# Altium PCB A-865_ATMEGA1_BHARAT AERO (1).PcbDoc
Units mm, origin at the board's own origin, x right, y up, seen from the top; angles counter-clockwise.
Board outline 160.15 x 104.65 mm, 2 copper layers (Top Layer, Bottom Layer); 38 components, 61 nets, 195 pads, 16 vias.
Unrouted connection lines stored in the file: 1.
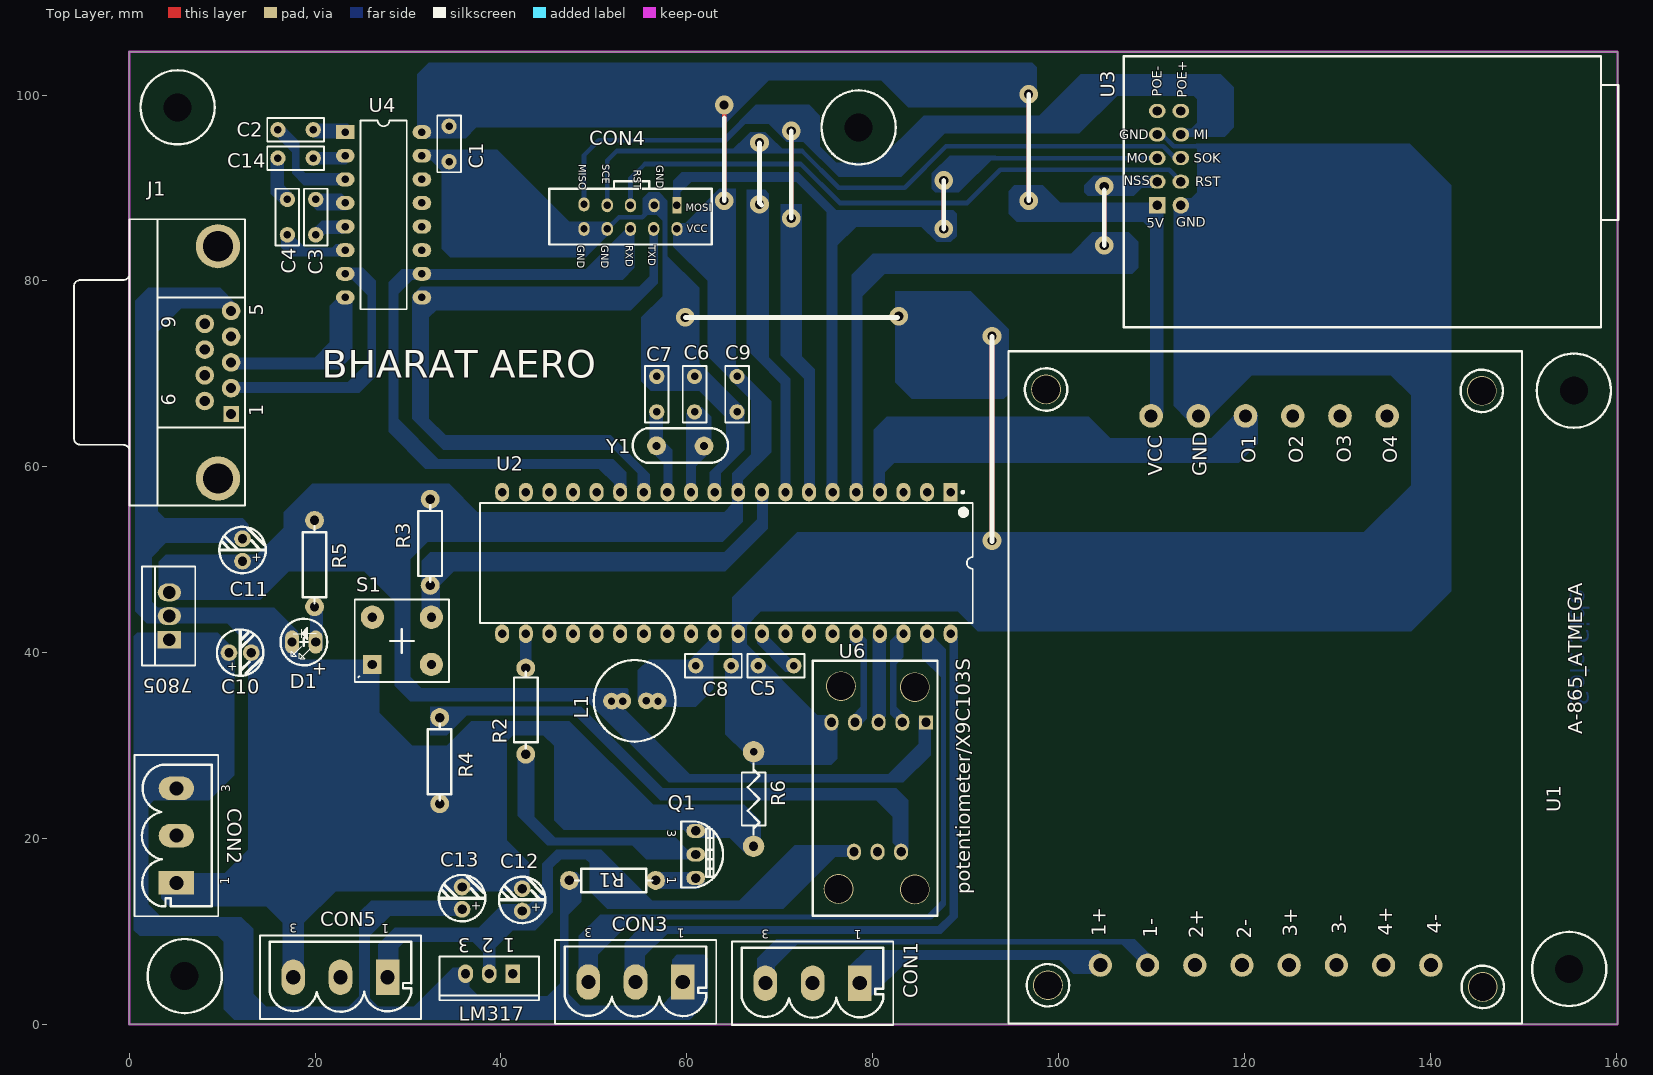
[diagram p0: Top Layer view]
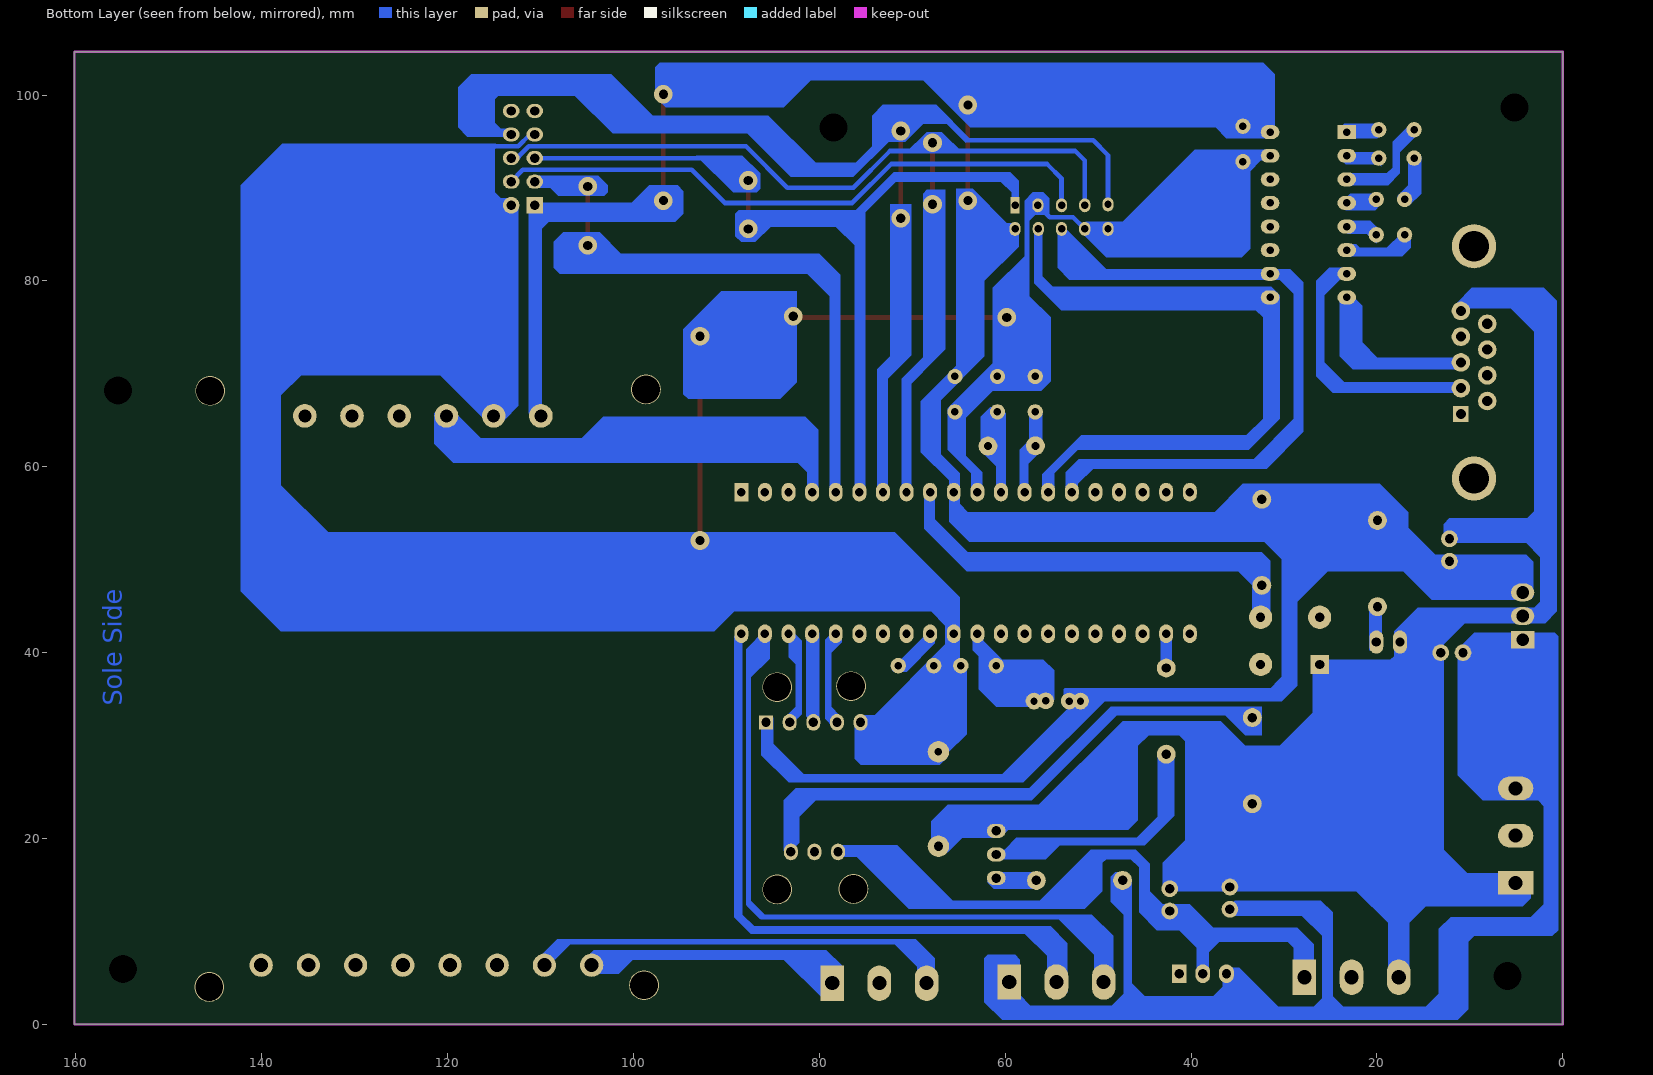
[diagram p1: Bottom Layer view, seen from below]

## Layer stack, top to bottom
Top Solder: solder mask 0.0102, Solder Resist, Dk 3.5
Top Layer: signal copper 0.0356
Dielectric1: dielectric 0.32, FR-4, Dk 4.8
Bottom Layer: signal copper 0.0356
Bottom Solder: solder mask 0.0102, Solder Resist, Dk 3.5

## Board outline
0,0 0,104.648 160.147,104.648 160.147,0

## Design rules (kind name [scope] priority, off if disabled: settings)
Clearance [All] p1: gap=0.254
PolygonConnect [All] p1: connectstyle=Relief reliefconductorwidth=0.254 reliefentries=4 polygonreliefangle="90 Angle" airgapwidth=0.254
RoomDefinition "A-865_ATMEGA1_BHARAT AERO (1)" [InComponentClass('A-865_ATMEGA1_BHARAT AERO (1)')] p1: confinementstyle=ConfineIn formatcopy=TRUE lockcomponents=FALSE outline -221.869,-110.998 -171.069,-110.998 -171.069,-85.598 -221.869,-85.598
RoutingVias [All] p1: holewidth=0.711 width=1.27 viastyle="Through Hole" minholewidth=0.711 minwidth=1.27 maxholewidth=0.711 maxwidth=1.27
SolderMaskExpansion [All] p1: expansion=0.102
Width [All] p1: maxlimit=0.5 minlimit=0.254 preferedwidth=0.35 minimp=50.000000 maximp=50.000000 favimp=50.000000
30 further rules are at their usual default settings.

## Components (designator, comment, footprint, x,y, rotation, side; value= is the part's Value field where it differs from the comment)
7805 "Volt Reg" 7805/TO220AB 4.318,41.402 r90 top
C1 "Cap" RAD/.150X.150/LS.100/.031 34.417,96.647 r270 top
C2 "Cap" RAD/.150X.150/LS.100/.031 19.812,96.266 r180 top
C3 "Cap" RAD/.150X.150/LS.100/.031 20.066,88.773 r270 top
C4 "Cap" RAD/.150X.150/LS.100/.031 17.018,84.963 r90 top
C5 "Cap" RAD/.150X.150/LS.100/.031 71.501,38.608 r180 top
C6 "Cap" RAD/.150X.150/LS.100/.031_10 60.833,69.723 r270 top
C7 "Cap" RAD/.150X.150/LS.100/.031_10 56.769,69.723 r270 top
C8 "Cap" RAD/.150X.150/LS.100/.031 64.77,38.608 r180 top
C9 "Cap" RAD/.150X.150/LS.100/.031 65.405,65.913 r90 top
C10 "Cap2" 100UF/16V 11.938,40.005 r0 top
C11 "Cap2" 100UF/16V 12.192,51.054 r90 top
C12 "NP" 100UF/16V 42.291,13.405 r90 top
C13 "Cap2" 100UF/16V 35.814,13.589 r90 top
C14 "Cap" RAD/.150X.150/LS.100/.031 19.812,93.218 r180 top
CON1 "CONNECTOR/5mm" "Applied- 3 pin 5.08mm pitch New1" 78.613,4.445 r180 top
CON2 "CONNECTOR" "Applied- 3 pin 5.08mm pitch New1" 5.08,15.24 r90 top
CON3 "CONNECTOR" "Applied- 3 pin 5.08mm pitch New1" 59.563,4.572 r180 top
CON4 "AVRUSBASP" DIP10 58.935,88.138 r270 top
CON5 "CONNECTOR" "Applied- 3 pin 5.08mm pitch New1" 27.813,5.08 r180 top
D1 "5MM PITCH" LED_5MM 18.796,41.148 r180 top
J1 "D Connector 9" DSUB1.385-2H9 0.048,71.235 r90 top
L1 "Inductor" WE-7447462033 53.146,34.798 r0 top
LM317 "LM317KC" KC03 38.735,5.461 r180 top
Q1 "NPN/2n2222" "TO-92 CASE 123" 60.96,18.288 r270 top
R1 "Res Semi" 1.5K/AXIAL0.4_SMALL 57.531,15.494 r180 top
R2 "Res1" 1.5K/AXIAL0.4_SMALL 42.672,39.243 r270 top
R3 "Res3" 1.5K/AXIAL0.4_SMALL 32.385,46.355 r90 top
R4 "Res1" 1.5K/AXIAL0.4_SMALL 33.401,22.86 r90 top
R5 "Res1" 1.5K/AXIAL0.4_SMALL 19.939,44.069 r90 top
R6 "Res3" RESISTANCE-1/4W 67.183,19.177 r90 top
S1 "SW-PB" "TECTILE SWITCH-SW1" 29.337,41.275 r0 top
U1 "OPTOCOUPLER" OPTOCOUPLER 149.86,0.102 r90 top
U2 "ATmega16-16PC" 40P6 64.262,49.657 r270 top
U3 "W5100" W5100 110.617,98.298 r0 top
U4 "MAX232" mx232 23.241,96.012 r0 top
U6 "potentiometer/X9C103S" POTENTIOMETER1 85.725,32.512 r270 top
Y1 "XTAL" "CRYSTAL KDS16" 56.744,62.255 r0 top

## Footprints (in the part's own frame and the unit in brackets; to place one, negate y for a bottom-side part, rotate by r counter-clockwise, add the part's x,y. Pads: shape width x height; smd on the part's side, far side on the other; paste and mask are expansions set on the pad)
1.5K/AXIAL0.4_SMALL [mil]
  round 80 / inner round 62 / far side round 80 hole 40: 1(35,0) 2(400,0)
  silkscreen extent 50,-50 375,50
40P6 [mm] "DIP, 40-Leads, Row Spacing 15.24mm, Pitch 2.54mm, Body 52.2x13.95mm"
  rect 2x1.5 hole 0.9: 1(-7.62,24.13)
  oval 2x1.5 hole 0.9: 2(-7.62,21.59) 3(-7.62,19.05) 4(-7.62,16.51) 5(-7.62,13.97) 6(-7.62,11.43) 7(-7.62,8.89) 8(-7.62,6.35) 9(-7.62,3.81) 10(-7.62,1.27) 11(-7.62,-1.27) 12(-7.62,-3.81) 13(-7.62,-6.35) 14(-7.62,-8.89) 15(-7.62,-11.43) 16(-7.62,-13.97) 17(-7.62,-16.51) 18(-7.62,-19.05) 19(-7.62,-21.59) 20(-7.62,-24.13) 21(7.62,-24.13) 22(7.62,-21.59) 23(7.62,-19.05) 24(7.62,-16.51) 25(7.62,-13.97) 26(7.62,-11.43) 27(7.62,-8.89) 28(7.62,-6.35) 29(7.62,-3.81) 30(7.62,-1.27) 31(7.62,1.27) 32(7.62,3.81) 33(7.62,6.35) 34(7.62,8.89) 35(7.62,11.43) 36(7.62,13.97) 37(7.62,16.51) 38(7.62,19.05) 39(7.62,21.59) 40(7.62,24.13)
  silkscreen extent -7.74,-26.5 6.45,26.5, body extent -7.05,-26.47 7.05,26.47, height 4.83
100UF/16V [mm]
  round 1.8 hole 1.016: 1(-1.2,0) 2(1.2,0)
  silkscreen extent -2.5,-2.5 2.5,2.5
7805/TO220AB [mm]
  rect 1.905x2.5 hole 1.372: 1(0,0)
  oval 1.905x2.5 hole 1.372: 2(2.54,0) 3(5.08,0)
  silkscreen extent -2.79,-2.79 7.87,2.92
"Applied- 3 pin 5.08mm pitch New1" [mm]
  rect 2.54x3.81 / inner round 1.524 / far side rect 2.54x3.81 hole 1.52: 1(0,0)
  oval 2.54x3.81 / inner round 1.524 / far side oval 2.54x3.81 hole 1.52: 2(5.08,0) 3(10.16,0)
  silkscreen extent -3.6,-4.5 13.76,4.5
"CRYSTAL KDS16" [mil]
  round 80 / inner round 79.9 / far side round 80 hole 34: 1(0,0) 2(201,-1)
  silkscreen extent -101,-71 303,74
DIP10 [mm]
  rect 1.8x1 hole 0.8: 1(0,0)
  oval 1.5x1.2 hole 0.8: 2(2.54,0) 3(0,-2.45) 4(2.54,-2.5) 5(0,-5) 6(2.54,-5) 7(0,-7.5) 8(2.54,-7.5) 9(-0.1,-10) 10(2.54,-10)
  silkscreen extent -2.59,-13.75 4.22,3.75
DSUB1.385-2H9 [mm] "Connector; D Subminiature; 9 Position; Right Angle; Pitch 1.385 mm"
  rect 1.69x1.69 hole 1.09: 1(-5.54,-10.92)
  round 2 hole 1.09: 2(-2.77,-10.92) 3(0,-10.92) 4(2.77,-10.92) 5(5.54,-10.92) 6(-4.155,-8.08) 7(-1.385,-8.08) 8(1.385,-8.08) 9(4.155,-8.08)
  round 4.76 hole 3.26: 10(-12.495,-9.5) 11(12.495,-9.5)
  silkscreen extent -15.4,-12.4 15.4,6
KC03 [mm] "TO, Thru-Hole, Vertical, Heatsink Mounted; 3 In-Line Leads; Pitch 2.54 mm"
  rect 1.6x2 hole 1: 1(-2.54,0)
  oval 1.6x2 hole 1: 2(0,0) 3(2.54,0)
  silkscreen extent -5.35,-1.85 5.35,2.85
LED_5MM [mm]
  oval 1.499x2.5 hole 0.991: 1(-1.27,0) 2(1.27,0)
  silkscreen extent -2.51,-2.51 2.5,2.51
mx232 [mm]
  rect 2x1.5 hole 0.8: 1(0,0)
  oval 2x1.5 hole 0.8: 2(0,-2.54) 3(0,-5.08) 4(0,-7.62) 5(0,-10.16) 6(0,-12.7) 7(0,-15.24) 8(0,-17.78) 9(8.26,-17.78) 10(8.26,-15.24) 11(8.26,-12.7) 12(8.26,-10.16) 13(8.26,-7.62) 14(8.26,-5.08) 15(8.26,-2.54) 16(8.26,0)
  silkscreen extent 1.63,-19.05 6.62,1.27
OPTOCOUPLER [mil]
  round 98.43 hole 59.06: 1(247,1786) 2(247,1586) 3(247,1386) 4(247,1186) 5(247,986) 6(247,786) 7(247,586) 8(247,386)
  round 100 hole 55: 9(2574,571) 10(2574,771) 11(2574,971) 12(2574,1171) 13(2574,1371) 14(2574,1571)
  round 125.98 hole 118.11: MH(155,166) MH(162,2008) MH(2680,170) MH(2686,2016)
  silkscreen extent 0,0 2848,2175
POTENTIOMETER1 [mm]
  rect 1.5x1.5 hole 1: 1(0,0)
  oval 1.8x1.5 hole 1: 2(0,-2.54) 3(0,-5.08) 4(0,-7.62) 5(0,-10.16) 6(13.945,-7.747) 7(13.945,-5.207) 8(13.945,-2.667)
  round 3.2 hole 3: MH(-3.886,-9.144) MH(-3.785,-1.194) MH(17.932,-9.398) MH(17.983,-1.194)
  silkscreen extent -6.6,-12.17 20.81,1.25
RAD/.150X.150/LS.100/.031 [mil]
  round 65 / inner round 52 / far side round 65 hole 32: 1(0,0) 2(150,0)
  silkscreen extent -45,-50 195,50
RAD/.150X.150/LS.100/.031_10 [mil]
  round 65 / inner round 52 / far side round 65 hole 32: 1(0,0) 2(150,0)
  silkscreen extent -45,-50 195,50
RESISTANCE-1/4W [mm]
  round 2.3 hole 1: 1(0,0)
  round 2.3 hole 0.813: 2(10.16,0)
  silkscreen extent 1.27,-1.27 8.89,1.27
"TECTILE SWITCH-SW1" [mm]
  rect 2x2 hole 1: 1(-3.17,-2.54)
  round 2.5 hole 1: 2(3.18,-2.54) 3(-3.17,2.54) 4(3.18,2.54)
  silkscreen extent -5.07,-4.44 5.08,4.44
"TO-92 CASE 123" [mm]
  oval 1.52x2.029 hole 1.019: 1(2.54,0) 2(0,0) 3(-2.54,0)
  silkscreen extent -3.56,-1.55 3.56,2.93
W5100 [mm]
  rect 1.8x1.8 hole 1: 1(0,-10.16)
  round 1.8 hole 1: 2(2.54,-10.16)
  oval 1.8x1.5 hole 1: 3(0,-7.62) 4(2.54,-7.62) 5(0,-5.08) 6(2.54,-5.08) 7(0,-2.54) 8(2.54,-2.54) 9(0,0) 10(2.54,0)
  silkscreen extent -3.61,-23.29 49.59,5.88
WE-7447462033 [mm]
  round 1.8 hole 0.8: 1(-0.029,0) 2(2.5,0.018) 3(-1.25,0) 4(3.75,0)
  silkscreen extent -3.15,-4.36 5.63,4.42

## Part data
7805: "Voltage Regulator"
C1 C2 C3 C4 C5 C6 C7 C8 C9 C10 C11 C13 C14: "Capacitor"
C12: library part Cap2, "Capacitor"
CON1: library part CONNECTOR
CON4: library part "avrusb asp"
D1: library part LED0, "Typical INFRARED GaAs LED"
J1: "Receptacle Assembly, 9 Position, Right Angle"
LM317: "3-Terminal Adjustable Regulator"
Q1: library part NPN, "NPN Bipolar Transistor"
R1: "Semiconductor Resistor"
R2 R3 R4 R5 R6: "Resistor"
S1: "Switch"
U2: "8-Bit AVR Microcontroller with 16K Bytes of In-System Programmable Flash Memory"
U6: library part POTENTIOMETER1
Y1: "Crystal Oscillator"

## Free pads (board coordinates)
  round 1 hole 3: 3(5.207,98.679) 3(5.969,5.207) 3(78.486,96.52) 3(154.94,5.969) 3(155.448,68.199)

## Via types
v1: diameter 2, hole 1, Top Layer to Bottom Layer, 16 vias

## Nets (pads, with @x,y where several pads share a name; then routed paths per layer and width w, separated by ;. In a path a pad name is that pad's centre, name@x,y a point inside that pad or via, vN(x,y) a via of type N, cw(c..) or ccw(c..) an arc to the next point about the centre after c; other vN are vias at no path point)
24V: 7805.1 C10.1 C13.1 CON2.3 CON3.1 LM317.3 R1.2 | length 147
  Bottom Layer w0.5: 7805.1@3.175,41.402 7.436,41.402 8.833,40.005 8.833,29.153 CON2.3 2.286,25.4 1.651,24.765 1.651,11.557 2.413,10.795 11.176,10.795 12.319,9.652 12.319,1.651 12.573,1.397 24.765,1.397 25.4,2.032 ; C13.1 27.756,12.389 25.4,10.033 25.4,2.032 ; LM317.3 36.068,5.334 36.068,2.54 ; R1.2 46.863,14.986 46.863,2.921 ; CON3.1 59.563,1.905 59.182,1.524 48.26,1.524 46.863,2.921 ; 25.4,2.032 26.416,1.016 34.544,1.016 36.068,2.54 ; 36.068,2.54 37.084,1.524 45.466,1.524 46.863,2.921
GND: 7805.2 C1.2 C5.2 C6.1 C7.1 C8.1 C9.1 C10.2 C11.2 C12.2 C13.2 CON2.1 CON4.3 CON4.8 CON4.10 CON5.3 D1.2 J1.5 Q1.3 R4.1 R6.1 R6.2 S1.1 U1.13 U2.11 U2.31 U3.2 U3.7 U4.15 U6.5 | length 550.8
  Top Layer w0.5: v1(59.817,76.073) 82.677,76.073 v1(82.804,76.2) ; v1(92.837,52.07) v1(92.837,74.041)
  Bottom Layer w0.5: CON2.1 14.605,15.24 ; J1.5 10.146,77.597 3.175,77.597 1.27,75.692 1.27,53.848 1.651,53.467 ; C11.2 11.106,53.34 1.778,53.34 1.651,53.467 ; CON5.3 17.399,5.334 17.399,12.446 ; 26.04,36.195 16.002,36.195 ; U4.15 33.782,93.472 C1.2 34.417,86.233 35.052,85.598 CON4.10 CON4.8 52.705,86.868 55.215,86.868 CON4.3 57.658,86.965 57.658,70.612 C7.1 C6.1 ; C12.2 35.998,14.605 C13.2 ; v1(59.817,76.073) 59.817,70.739 C6.1 ; U2.11 62.992,59.182 65.405,61.595 C9.1 61.595,69.723 C6.1 ; R6.1 65.532,20.828 Q1.3 60.071,21.717 57.277,21.717 46.736,32.258 37.465,32.258 35.306,30.099 35.306,15.297 C13.2 ; 69.358,49.038 66.294,45.974 ; U6.5 72.39,29.337 R6.2 67.691,29.845 C5.2 C8.1 65.532,39.37 U2.31 65.532,45.212 66.294,45.974 ; v1(82.804,76.2) 90.678,76.2 v1(92.837,74.041) ; U3.7 111.125,95.758 112.395,94.488 114.935,94.488 115.316,94.107 ; U1.13 113.157,67.361 U3.2 114.935,88.138 115.316,88.519 115.316,94.107 ; 1.651,53.467 0.889,52.705 0.889,44.704 1.651,43.942 10.16,43.942 13.617,40.485 C10.2 14.605,40.005 14.605,37.592 16.002,36.195 ; 14.605,15.24 14.605,34.798 16.002,36.195 ; 14.605,15.24 17.399,12.446 ; 17.399,12.446 19.742,14.789 C13.2 ; 66.294,45.974 132.715,45.974 139.319,52.578 139.319,88.646 133.858,94.107 115.316,94.107
NetC2_1: C2.1 U4.1 | length 3.5
  Bottom Layer w0.5: C2.1 20.066,96.012 U4.1
NetC2_2: C2.2 U4.3 | length 10.9
  Bottom Layer w0.5: C2.2 17.907,94.361 17.907,91.948 18.923,90.932 U4.3
NetC3_1: C3.1 U4.4 | length 3.3
  Bottom Layer w0.5: C3.1 20.447,88.392 U4.4
NetC3_2: C3.2 U4.5 | length 3.5
  Bottom Layer w0.5: C3.2 20.955,85.852 U4.5
NetC4_1: C4.1 U4.6 | length 6.9
  Bottom Layer w0.5: C4.1 18.669,83.312 U4.6
NetC4_2: C4.2 C14.2 | length 5
  Bottom Layer w0.5: C14.2@16.129,93.091 C14.2 16.002,89.789 C4.2
NetC5_1: C5.1 U2.32 | length 4.8
  Bottom Layer w0.5: U2.32 C5.1
NetC6_2: C6.2 U2.12 Y1.2 | length 9.6
  Bottom Layer w0.5: U2.12 60.452,60.833 Y1.2 60.833,63.246 C6.2
NetC7_2: C7.2 U2.13 Y1.1 | length 9.1
  Bottom Layer w0.5: C7.2 56.769,62.281 Y1.1 57.912,61.087 U2.13
NetC8_2: C8.2 L1.2 U2.30 | length 13
  Bottom Layer w0.5: L1.2@55.011,35.451 60.343,35.451 60.96,36.068 C8.2 62.992,40.64 U2.30
NetC12_1: C12.1 CON5.1 LM317.2 U6.6 | length 71.8
  Bottom Layer w0.5: CON5.1 27.813,8.636 29.337,10.16 37.465,10.16 38.735,8.89 ; LM317.2 38.735,8.89 ; U6.6 75.082,18.567 69.342,12.827 51.943,12.827 51.308,13.462 51.308,17.526 50.292,18.542 46.355,18.542 45.212,17.399 45.212,13.335 44.082,12.205 C12.1 42.05,12.205 38.735,8.89
NetC14_1: C14.1 U4.2 | length 3.5
  Bottom Layer w0.5: C14.1 20.066,93.472 U4.2
NetCON1_1: CON1.1 U1.1 | length 27.7
  Bottom Layer w0.5: CON1.1 78.613,4.826 81.153,7.366 103.505,7.366 U1.1
NetCON1_3: CON1.3 U1.2 | length 45.4
  Bottom Layer w0.5: CON1.3 68.453,6.858 70.485,8.89 107.061,8.89 U1.2
NetCON3_2: CON3.2 U2.40 | length 70
  Bottom Layer w0.5: CON3.2 54.483,8.255 56.261,10.033 87.249,10.033 88.773,11.557 88.773,41.656 U2.40
NetCON3_3: CON3.3 U2.39 | length 73.5
  Bottom Layer w0.5: CON3.3 49.403,7.874 53.086,11.557 86.233,11.557 87.63,12.954 87.63,40.259 U2.39
NetCON4_1: CON4.1 U2.6 U3.5 | length 93.7
  Top Layer w0.5: v1(87.63,85.598) v1(87.63,90.805)
  Bottom Layer w0.5: CON4.1 58.935,90.558 59.817,91.44 71.882,91.44 75.946,87.376 76.327,87.376 ; U2.6 75.692,86.741 76.327,87.376 ; v1(87.63,85.598) 87.63,85.979 86.233,87.376 76.327,87.376 ; v1(87.63,90.805) 90.043,93.218 U3.5
NetCON4_4: CON4.4 U2.14 U4.9 | length 72.5
  Bottom Layer w0.5: U2.14 55.372,59.309 52.324,62.357 34.295,62.357 31.501,65.151 U4.9 54.356,78.232 56.435,80.311 CON4.4
NetCON4_5: CON4.5 U3.4 | length 66.5
  Bottom Layer w0.5: CON4.5 53.935,91.019 55.499,92.583 72.263,92.583 76.454,88.392 90.17,88.392 93.726,91.948 111.887,91.948 U3.4
NetCON4_6: CON4.6 U2.15 U4.10 | length 73.7
  Bottom Layer w0.5: U2.15 52.832,59.436 51.689,60.579 32.512,60.579 28.194,64.897 28.194,79.248 29.718,80.772 U4.10 52.451,80.772 53.935,82.256 CON4.6
NetCON4_7: CON4.7 U2.8 U3.6 | length 111
  Top Layer w0.5: v1(67.818,88.265) v1(67.818,94.869)
  Bottom Layer w0.5: CON4.7 51.435,92.964 52.451,93.98 68.707,93.98 ; v1(67.818,88.265) 67.818,72.009 70.612,69.215 U2.8 ; v1(67.818,94.869) 68.707,93.98 ; U3.6 112.522,93.218 112.021,93.719 112.021,93.737 111.27,94.488 87.884,94.488 83.439,90.043 76.327,90.043 72.39,93.98 68.707,93.98
NetCON4_9: CON4.9 U2.7 U3.8 | length 127.5
  Top Layer w0.5: v1(71.247,86.741) v1(71.247,96.139)
  Bottom Layer w0.5: CON4.9 48.935,93.512 50.546,95.123 64.135,95.123 66.548,97.536 69.469,97.536 v1@70.739,96.266 ; v1@70.739,86.868 70.739,71.755 73.152,69.342 U2.7 ; v1(71.247,96.139) v1@72.136,96.139 ; v1@71.628,96.266 76.454,91.44 82.677,91.44 88.249,97.012 100.838,97.012 104.537,100.711 115.316,100.711 116.332,99.695 116.332,97.282 114.808,95.758 U3.8 U3.8@113.284,95.631
NetD1_1: D1.1 R5.1 | length 2.4
  Bottom Layer w0.5: D1.1@20.193,41.148 20.193,43.561
NetJ1_2: J1.2 U4.7 | length 29.1
  Bottom Layer w0.5: J1.2 24.904,68.465 26.035,69.596 26.035,80.01 25.273,80.772 U4.7
NetJ1_3: J1.3 U4.8 | length 18.8
  Bottom Layer w0.5: J1.3 22.467,71.235 23.241,72.009 U4.8
NetQ1_1: Q1.1 R1.1 | length 4.4
  Bottom Layer w0.5: R1.1 56.896,15.748 Q1.1
NetQ1_2: Q1.2 R2.2 | length 26.9
  Bottom Layer w0.5: R2.2 42.672,21.971 44.958,19.685 58.547,19.685 59.944,18.288 Q1.2
NetR2_1: R2.1 U2.22 | length 3.7
  Bottom Layer w0.5: R2.1 U2.22
NetR4_2: R4.2 U6.8 | length 60.1
  Bottom Layer w0.5: 32.639,31.877 34.163,31.877 36.068,33.782 48.514,33.782 57.531,24.765 81.28,24.765 83.058,22.987 U6.8
NetU1_12: U1.12 U2.4 | length 45.3
  Bottom Layer w0.5: U2.4 80.772,61.722 81.915,62.865 117.5,62.865 U1.12
NetU2_1: U2.1
NetU2_2: U2.2
NetU2_3: U2.3
NetU2_5: U2.5 U3.3 | length 66.4
  Top Layer w0.5: v1(104.902,83.82) v1(104.902,90.17)
  Bottom Layer w0.5: U2.5 78.232,79.756 80.645,82.169 106.553,82.169 v1(104.902,83.82) ; v1(104.902,90.17) 105.41,90.678 U3.3
NetU2_16: U2.16
NetU2_17: U2.17
NetU2_18: U2.18
NetU2_19: U2.19
NetU2_20: U2.20
NetU2_21: U2.21
NetU2_23: U2.23
NetU2_24: U2.24
NetU2_25: U2.25
NetU2_26: U2.26
NetU2_27: U2.27
NetU2_28: U2.28
NetU2_29: U2.29
NetU2_33: U2.33
NetU2_34: U2.34
NetU2_35: U2.35
NetU2_36: U2.36 U6.4 | length 10.3
  Bottom Layer w0.5: U6.4 79.105,33.512 79.105,41.164 U2.36
NetU2_37: U2.37 U6.3 | length 9.6
  Bottom Layer w0.5: U6.3 80.645,41.91 U2.37
NetU2_38: U2.38 U6.2 | length 10.4
  Bottom Layer w0.5: U6.2 82.169,33.528 82.169,40.894 U2.38
NetU4_11: U4.11
NetU4_12: U4.12
NetU4_13: U4.13
NetU4_14: U4.14
RESET: R3.1 S1.4 U2.9 | length 46.5
  Bottom Layer w0.5: S1.4@32.39,43.815 32.385,43.82 32.385,49.53 33.02,50.165 64.262,50.165 68.072,53.975 U2.9
VCC: 7805.3 C1.1 C9.2 C11.1 CON4.2 L1.1 L1.3 R3.2 R5.2 U1.14 U2.10 U3.1 U4.16 U6.1 | length 317
  Top Layer w0.5: v1(64.008,88.646) v1(64.008,98.933) ; v1(96.774,88.646) v1(96.774,100.076)
  Bottom Layer w0.5: 7805.3 8.82,46.482 C11.1 14.04,49.854 17.335,53.149 ; 17.272,53.213 17.335,53.149 ; U4.16 33.782,96.012 C1.1 35.052,97.282 63.754,97.282 64.008,97.536 v1(64.008,98.933) 65.405,98.933 69.342,102.87 93.98,102.87 v1(96.774,100.076) ; L1.3@52.482,35.433 31.877,35.433 29.845,37.465 29.845,51.181 ; L1.1@52.665,35.433 52.665,33.949 60.071,26.543 82.296,26.543 85.725,29.972 U6.1 ; CON4.2 62.865,85.598 ; v1(64.008,88.646) 64.008,86.741 62.865,85.598 ; v1(96.774,88.646) 97.282,88.138 U3.1 110.617,66.142 U1.14 ; 17.335,53.149 19.304,51.181 29.845,51.181 ; 29.845,51.181 29.845,52.451 32.385,54.991 34.163,53.213 63.627,53.213 65.532,55.118 U2.10 65.532,59.436 67.564,61.468 67.564,67.564 C9.2 63.627,71.501 63.627,84.836 62.865,85.598
pads on no net: CON1.2 CON2.2 CON5.2 J1.1 J1.4 J1.6 J1.7 J1.8 J1.9 J1.10 J1.11 L1.4 LM317.1 S1.2 S1.3 U1.3 U1.4 U1.5 U1.6 U1.7 U1.8 U1.9 U1.10 U1.11 U1.MH U3.9 U3.10 U6.7 U6.MH

## Keep-outs
Keep-Out Layer:
  the board outline again, w0.254

## Other copper
Bottom Layer:
  rectangle net NetD1_1: 19.431,40.259 20.828,45.339
  rectangle net NetR2_1: 42.037,37.973 43.307,42.418
  region net GND: 82.423,78.867 82.423,69.088 84.201,67.31 94.107,67.31 94.615,67.818 94.615,74.803 90.551,78.867
  region net NetU2_38: 82.931,32.385 81.915,33.401 81.915,41.275 83.312,42.672 83.312,39.497 82.55,38.735 82.55,34.163 83.693,33.02
  region net NetU2_37: 80.01,32.385 80.01,42.164 80.518,42.672 80.772,42.672 81.407,42.037 81.407,33.147 80.518,32.258
  region net NetU2_36: 77.851,33.274 78.74,34.163 78.74,40.005 77.597,41.148 77.597,42.418 77.851,42.672 78.105,42.672 79.375,41.402 79.375,32.893 78.486,32.004
  region net NetCON4_7: 70.104,57.15 70.104,68.961 67.564,71.501 67.564,89.027 68.199,89.027 68.199,72.39 71.12,69.469 71.12,56.896
  region net NetCON4_9: 72.644,57.404 72.644,69.469 70.104,72.009 70.104,88.265 72.39,88.265 72.39,71.882 73.787,70.485 73.787,57.404
  region net NetC6_2: 59.944,57.15 59.944,65.786 60.579,66.421 61.595,66.421 62.611,65.405 62.611,61.722 60.96,60.071 60.96,57.023
  region net NetC7_2: 57.531,57.277 57.531,60.325 56.007,61.849 56.007,65.786 56.642,66.421 57.023,66.421 57.404,66.04 57.404,62.865 58.42,61.849 58.42,56.896
  region net NetC2_2: 23.368,90.297 18.796,90.297 17.526,91.567 17.526,93.853 15.367,96.012 15.748,96.012 16.51,96.774 18.288,94.996 18.288,92.202 18.923,91.567 23.241,91.567 23.495,91.313
  region net NetC3_2: 19.431,84.963 19.431,85.217 20.701,86.487 23.495,86.487 23.749,86.233 23.749,85.725 23.114,85.09 21.082,85.09 20.066,84.074
  region net NetC3_1: 20.066,89.408 22.86,89.408 23.495,88.773 23.495,87.757 23.368,87.63 20.193,87.63 19.685,88.138
  region net NetC14_1: 19.558,93.853 23.495,93.853 23.876,93.472 23.876,93.091 23.368,92.583 19.812,92.583 19.558,92.329
  region net NetC2_1: 19.558,96.901 23.495,96.901 23.749,96.647 23.749,95.504 23.876,95.377 19.939,95.377 19.558,95.758
  region net GND: 62.484,57.277 62.484,59.436 64.262,61.214 64.262,65.278 61.341,68.199 56.134,68.199 55.118,69.215 55.118,76.073 57.404,78.359 57.404,86.487 56.769,87.122 55.753,87.122 55.245,86.614 55.245,88.9 55.88,89.535 57.023,89.535 57.912,88.646 57.912,82.677 61.341,79.248 61.341,71.12 66.167,66.294 66.167,61.849 63.627,59.309 63.627,57.15
  region net VCC: 30.988,102.235 32.258,103.505 97.155,103.505 97.663,102.997 97.663,99.822 96.52,98.679 83.82,98.679 80.899,101.6 68.834,101.6 63.754,96.52 37.338,96.52 36.195,95.377 31.496,95.377 30.988,95.885
  region net GND: 31.496,94.107 39.624,94.107 47.371,86.36 51.308,86.36 51.943,85.725 51.943,85.344 49.149,82.55 34.544,82.55 33.655,83.439 33.655,91.821 32.512,92.964 31.496,92.964
  region net NetCON4_4: 54.737,56.896 54.737,59.309 52.197,61.849 33.782,61.849 30.48,65.151 30.48,78.486 31.369,79.375 54.864,79.375 56.007,80.518 56.007,85.725 56.261,85.979 56.642,85.979 56.896,85.725 56.896,79.756 53.975,76.835 33.02,76.835 32.258,76.073 32.258,65.151 34.036,63.373 51.816,63.373 56.007,59.182 56.007,57.277
  region net NetCON4_6: 52.197,57.277 52.197,58.166 50.546,59.817 31.877,59.817 27.94,63.754 27.94,79.883 29.337,81.28 49.149,81.28 53.594,85.725 54.229,85.725 54.356,85.598 54.356,81.407 53.086,80.137 30.48,80.137 28.956,78.613 28.956,65.151 33.274,60.833 52.07,60.833 53.467,59.436 53.467,57.15
  region net NetJ1_2: 10.922,69.088 23.495,69.088 25.654,71.247 25.654,78.486 22.733,81.407 25.146,81.407 26.543,80.01 26.543,69.723 24.765,67.945 10.795,67.945 10.668,68.072
  region net NetJ1_3: 10.668,71.755 19.939,71.755 21.59,73.406 21.59,77.343 22.987,78.74 23.368,78.74 24.003,78.105 24.003,71.882 22.606,70.485 11.049,70.485 10.668,70.866
  region net NetC5_1: 67.564,42.418 67.564,41.021 70.612,37.973 72.009,37.973 72.136,38.1 72.136,38.354 68.453,42.037 68.453,42.545
  region net NetCON1_1: 77.597,2.921 77.597,6.35 79.248,8.001 104.267,8.001 105.537,6.731 105.537,5.969 105.029,5.461 101.6,5.461 100.076,6.985 83.82,6.985 79.756,2.921
  region net NetCON1_3: 67.564,3.81 67.564,7.112 69.596,9.144 108.204,9.144 110.49,6.858 110.49,5.715 110.109,5.334 106.807,8.636 71.882,8.636 69.469,6.223 69.469,3.81 69.215,3.556
  region net NetCON3_2: 53.34,3.429 53.34,8.763 55.118,10.541 86.995,10.541 88.265,11.811 88.265,42.291 88.138,42.418 88.519,42.418 89.154,41.783 89.154,11.557 87.376,9.779 57.912,9.779 55.499,7.366 55.499,3.429
  region net NetCON3_3: 48.387,4.064 48.387,9.525 50.673,11.811 85.852,11.811 87.376,13.335 87.376,37.338 85.344,39.37 85.344,41.91 85.852,42.418 87.884,40.386 87.884,13.081 86.106,11.303 54.229,11.303 50.419,7.493 50.419,3.937
  region net NetC12_1: 77.724,19.304 71.628,19.304 65.659,13.335 56.261,13.335 50.8,18.796 45.974,18.796 44.45,17.272 44.45,14.351 43.053,12.954 40.132,12.954 37.592,10.414 28.575,10.414 26.797,8.636 26.797,3.937 27.305,3.429 28.829,3.429 28.956,3.556 28.956,8.255 29.591,8.89 36.957,8.89 38.1,7.747 38.1,5.08 38.227,4.953 39.243,4.953 39.37,5.08 39.37,8.255 41.275,10.16 43.688,10.16 45.593,12.065 45.593,16.891 46.482,17.78 49.149,17.78 49.53,17.399 49.53,14.351 51.435,12.446 70.358,12.446 75.946,18.034 77.724,18.034
  region net NetQ1_1: 56.515,14.605 61.214,14.605 61.849,15.24 61.849,15.875 61.341,16.383 56.642,16.383 56.261,16.002
  region net NetQ1_2: 41.783,28.829 41.783,22.479 44.958,19.304 54.102,19.304 55.626,17.78 61.341,17.78 61.341,18.669 61.214,18.796 60.071,18.796 58.801,20.066 45.847,20.066 43.561,22.352 43.561,28.956
  region net VCC: 48.641,35.433 58.039,26.035 83.312,26.035 86.233,28.956 86.233,32.766 85.979,33.02 84.963,33.02 84.963,30.226 81.661,26.924 60.325,26.924 51.725,35.524
  region net NetC8_2: 62.357,42.418 62.357,41.275 60.325,39.243 55.88,39.243 54.737,38.1 54.737,34.925 55.499,34.163 60.96,34.163 62.865,36.068 62.865,39.624 63.5,40.259 63.5,42.037 63.119,42.418
  region net NetR4_2: 32.385,34.163 36.068,34.163 48.641,34.163 57.404,25.4 82.55,25.4 83.82,24.13 83.82,18.669 83.439,18.288 82.169,19.558 82.169,22.352 80.391,24.13 57.15,24.13 48.006,33.274 36.322,33.274 34.163,31.115 32.385,31.115
  region net RESET: 31.496,43.479 31.496,49.911 32.385,50.8 64.008,50.8 67.564,54.356 67.564,57.785 68.58,57.785 68.707,57.658 68.707,53.34 64.135,48.768 34.925,48.768 33.401,47.244 33.401,43.071
  region net VCC: 3.556,45.72 14.097,45.72 17.145,48.768 25.273,48.768 28.575,45.466 28.575,36.449 30.226,34.798 35.941,34.798 53.594,34.798 53.721,34.925 53.721,36.068 53.594,36.195 35.56,36.195 31.369,36.195 30.226,37.338 30.226,50.038 32.131,51.943 63.881,51.943 66.04,54.102 66.04,58.547 69.088,61.595 69.088,67.056 65.278,70.866 65.278,89.916 63.5,89.916 59.817,86.233 58.547,86.233 58.547,83.693 62.23,80.01 62.23,71.882 66.929,67.183 66.929,61.341 64.897,59.309 64.897,56.007 64.008,55.118 37.465,55.118 34.417,58.166 19.685,58.166 16.637,55.118 16.637,53.467 13.716,50.546 3.937,50.546 3.175,49.784 3.175,46.025
  region net 24V: 9.525,42.164 11.303,40.386 11.303,26.797 8.636,24.13 2.667,24.13 2.032,23.495 2.032,12.954 3.429,11.557 12.065,11.557 13.335,10.287 13.335,3.302 14.732,1.905 23.622,1.905 24.765,3.048 24.765,12.065 26.035,13.335 35.306,13.335 36.195,12.446 36.195,11.811 36.068,11.684 28.067,11.684 25.908,9.525 25.908,2.794 26.797,1.905 30.607,1.905 34.798,6.096 36.322,6.096 36.576,5.842 36.576,4.064 37.592,3.048 44.958,3.048 46.355,4.445 46.355,15.621 47.117,16.383 48.133,16.383 48.641,15.875 48.641,13.208 47.244,11.811 47.244,3.302 48.514,2.032 57.277,2.032 58.42,3.175 58.42,6.985 58.928,7.493 61.849,7.493 62.23,7.112 62.23,2.413 60.325,0.508 11.303,0.508 10.16,1.651 10.16,8.89 9.525,9.525 1.143,9.525 0.508,10.16 0.508,41.783 0.889,42.164
  region net GND: 16.51,4.318 16.51,10.922 14.732,12.7 4.318,12.7 3.429,13.589 3.429,15.748 3.937,16.256 10.287,16.256 12.827,18.796 12.827,40.894 10.541,43.18 1.905,43.18 0.635,44.45 0.635,77.851 2.032,79.248 9.779,79.248 11.43,77.597 11.43,76.327 11.303,76.2 10.414,77.089 5.588,77.089 3.048,74.549 3.048,55.245 3.81,54.483 12.192,54.483 12.827,53.848 12.827,52.197 12.446,51.816 3.937,51.816 2.413,50.292 2.413,45.466 3.048,44.831 15.621,44.831 18.161,42.291 18.161,39.624 18.542,39.243 26.924,39.243 26.924,35.814 26.924,33.528 30.48,29.972 34.163,29.972 36.83,32.639 47.371,32.639 56.388,23.622 66.167,23.622 67.945,21.844 67.945,19.05 67.437,18.542 66.167,18.542 64.643,20.066 60.579,20.066 59.69,20.955 46.736,20.955 45.72,21.971 45.72,29.972 44.577,31.115 41.275,31.115 40.64,30.48 40.64,19.812 43.053,17.399 43.053,14.986 42.418,14.351 22.225,14.351 18.796,10.922 18.796,4.318
  region net NetCON4_1: 75.057,57.404 75.057,87.376 71.755,90.678 60.452,90.678 59.309,89.535 59.309,88.138 58.547,88.138 58.547,90.805 59.436,91.694 72.009,91.694 76.073,87.63 88.646,87.63 89.027,87.249 89.027,84.836 88.392,84.201 86.868,84.201 85.217,85.852 78.232,85.852 76.2,83.82 76.2,57.404
  region net VCC: 108.839,65.659 109.855,66.675 109.855,85.598 109.093,86.36 95.504,86.36 94.615,87.249 94.615,89.662 95.25,90.297 98.298,90.297 100.203,88.392 110.744,88.392 111.252,87.884 111.252,65.786 110.617,65.151
  region net NetU2_5: 77.724,57.531 77.724,80.645 80.01,82.931 101.346,82.931 103.632,85.217 107.569,85.217 108.585,84.201 108.585,81.407 107.95,80.772 81.28,80.772 78.867,78.359 78.867,57.023
  region net NetU1_12: 80.137,56.896 80.137,64.008 81.534,65.405 103.251,65.405 105.664,62.992 116.332,62.992 119.761,66.421 120.777,66.421 121.412,65.786 121.412,62.484 119.38,60.452 82.296,60.452 81.28,59.436 81.28,56.896
  region net GND: 64.135,38.608 64.897,39.37 64.897,45.974 71.882,52.959 132.842,52.959 137.922,58.039 137.922,67.691 135.763,69.85 120.777,69.85 115.951,65.024 113.919,65.024 112.395,66.548 112.395,88.392 112.903,88.9 114.3,88.9 114.935,89.535 114.935,94.615 114.808,94.742 137.795,94.742 142.24,90.297 142.24,46.609 137.922,42.291 91.313,42.291 89.154,44.45 67.945,44.45 66.421,42.926 66.421,40.894 74.041,33.274 75.819,33.274 76.2,32.893 76.2,28.575 75.565,27.94 67.056,27.94 66.167,28.829 66.167,29.21 64.135,31.242
  region net NetC4_2: 15.24,93.345 15.24,89.408 16.51,88.138 17.145,88.138 17.78,88.773 17.78,89.154 16.637,90.297 16.637,93.345
  region net NetC4_1: 16.383,85.09 16.383,83.566 17.272,82.677 23.495,82.677 23.749,82.931 23.749,83.566 23.368,83.947 22.225,83.947 21.844,83.566 18.923,83.566 17.399,85.09
  region net NetCON4_1: 88.265,93.472 86.36,91.567 86.36,89.916 86.741,89.535 89.281,89.535 93.218,93.472
  region net NetU2_5: 110.617,91.313 103.759,91.313 102.743,90.297 102.743,89.535 103.124,89.154 108.077,89.154 108.966,90.043 110.617,90.043
  region net NetCON4_9: 62.484,95.377 63.881,95.377 67.437,98.933 69.85,98.933 77.597,91.186 76.327,91.186 72.517,94.996 70.739,94.996 68.834,96.901 66.294,96.901 64.262,94.869
  region net NetCON4_7: 64.516,93.726 66.802,96.012 68.453,96.012 70.739,93.726
  region net NetCON4_7: 66.421,89.789 68.453,89.789 68.834,89.408 68.834,71.755 71.12,69.469 69.596,69.469 67.564,71.501 66.421,72.644
  region net NetCON4_9: 69.85,98.933 73.152,98.933 74.295,97.79 74.295,93.726 69.85,98.171
  region net NetCON4_9: 76.073,92.71 80.391,92.71 85.471,97.79 97.917,97.79 102.362,102.235 117.475,102.235 118.872,100.838 118.872,96.52 117.856,95.504 113.03,95.504 112.649,95.885 113.157,96.393 114.3,96.393 114.935,97.028 114.935,99.568 114.554,99.949 106.299,99.949 102.235,95.885 87.757,95.885 83.058,91.186 76.327,91.186
  text "Sole Side" at 155.067,34.29 h2 r270

## Silkscreen, mask and mechanical layers (free items; w line width, h text height)
Top Overlay:
  circle w0.254: c155.448,68.199 r3.988
  circle w0.254: c5.207,98.679 r3.988
  circle w0.254: c154.94,5.969 r3.988
  circle w0.254: c78.486,96.52 r3.988
  circle w0.254: c5.969,5.207 r3.988
  lines w0.5: 59.817,76.073 82.677,76.073 ; 64.008,88.646 64.008,97.536 ; 67.818,94.869 67.818,88.392 68.072,88.138 ; 71.247,86.741 71.247,96.139 ; 87.63,85.598 87.63,90.805 ; 92.837,51.943 92.837,74.041 ; 96.774,88.646 96.774,100.076 ; 104.902,83.82 104.902,89.789
  text "POE-" at 111.125,99.822 h1.02 r90
  text "POE+" at 113.792,99.695 h1.02 r90
  text "GND" at 106.553,95.25 h1.02
  text "MI" at 114.554,95.25 h1.02
  text "MO" at 107.315,92.71 h1.02
  text "SOK" at 114.554,92.71 h1.02
  text "MISO" at 48.357,92.583 h0.8 r270
  text "SCE" at 50.897,92.583 h0.8 r270
  text "GND" at 56.689,92.456 h0.8 r270
  text "RST" at 54.276,91.948 h0.8 r270
  text "NSS" at 107.01,90.297 h1.02
  text "RST" at 114.681,90.17 h1.02
  text "MOSI" at 59.864,87.503 h0.8
  text "GND" at 112.649,85.852 h1.02
  text "5V" at 109.474,85.725 h1.02
  text "VCC" at 59.991,85.217 h0.8
  text "GND" at 48.23,83.82 h0.8 r270
  text "GND" at 50.77,83.82 h0.8 r270
  text "RXD" at 53.437,83.82 h0.8 r270
  text "TXD" at 55.85,83.82 h0.8 r270
  text "BHARAT AERO" at 20.701,69.596 h3
  text "O3" at 131.47,60.452 h1.52 r90
  text "O1" at 121.209,60.401 h1.52 r90
  text "O2" at 126.34,60.401 h1.52 r90
  text "O4" at 136.449,60.401 h1.52 r90
  text "VCC" at 111.15,59.03 h1.52 r90
  text "GND" at 115.926,58.979 h1.52 r90
  text "A-865_ATMEGA" at 156.337,31.242 h1.52 r90
  text "4-" at 141.199,9.754 h1.52 r90
  text "3-" at 130.962,9.703 h1.52 r90
  text "4+" at 135.89,9.55 h1.52 r90
  text "1+" at 105.08,9.474 h1.52 r90
  text "3+" at 125.679,9.423 h1.52 r90
  text "1-" at 110.617,9.322 h1.52 r90
  text "2+" at 115.57,9.271 h1.52 r90
  text "2-" at 120.726,9.246 h1.52 r90

## Text inside footprints (layer, text, board x,y; h text height)
C10: Top Overlay "+" at 10.538,38.93 h1 r180
C11: Top Overlay "+" at 13.267,49.654 h1 r270
C12: Top Overlay "+" at 43.366,12.005 h1 r270
C13: Top Overlay "+" at 36.889,12.189 h1 r270
CON1: Top Overlay "3" at 68.883,10.215 h0.95 r180; Top Overlay "1" at 78.803,10.145 h0.95 r180
CON2: Top Overlay "3" at 10.85,24.97 h0.95 r90; Top Overlay "1" at 10.78,15.05 h0.95 r90
CON3: Top Overlay "3" at 49.833,10.342 h0.95 r180; Top Overlay "1" at 59.753,10.272 h0.95 r180
CON5: Top Overlay "3" at 18.083,10.85 h0.95 r180; Top Overlay "1" at 28.003,10.78 h0.95 r180
D1: Top Overlay "+" at 21.336,38.862 h1.43 r180
J1: Top Overlay "1" at 14.423,65.445 h1.5 r90; Top Overlay "5" at 14.423,76.275 h1.5 r90; Top Overlay "9" at 5.023,74.89 h1.5 r90; Top Overlay "6" at 5.023,66.58 h1.5 r90
LM317: Top Overlay "3" at 36.695,9.286 h1.5 r180; Top Overlay "1" at 41.525,9.286 h1.5 r180; Top Overlay "2" at 39.235,9.286 h1.5 r180
Q1: Top Overlay "3" at 57.912,20.955 h0.95 r270; Top Overlay "1" at 57.912,15.875 h0.95 r270